# Altium PCB AD637-有效值检测新版.PcbDoc
Units mil, origin at the board's own origin, x right, y up, seen from the top; angles counter-clockwise.
Board outline 1968.5 x 1968.5 mil, 2 copper layers (Top Layer, Bottom Layer); 30 components, 19 nets, 97 pads, 12 vias.
Unrouted connection lines stored in the file: 2.
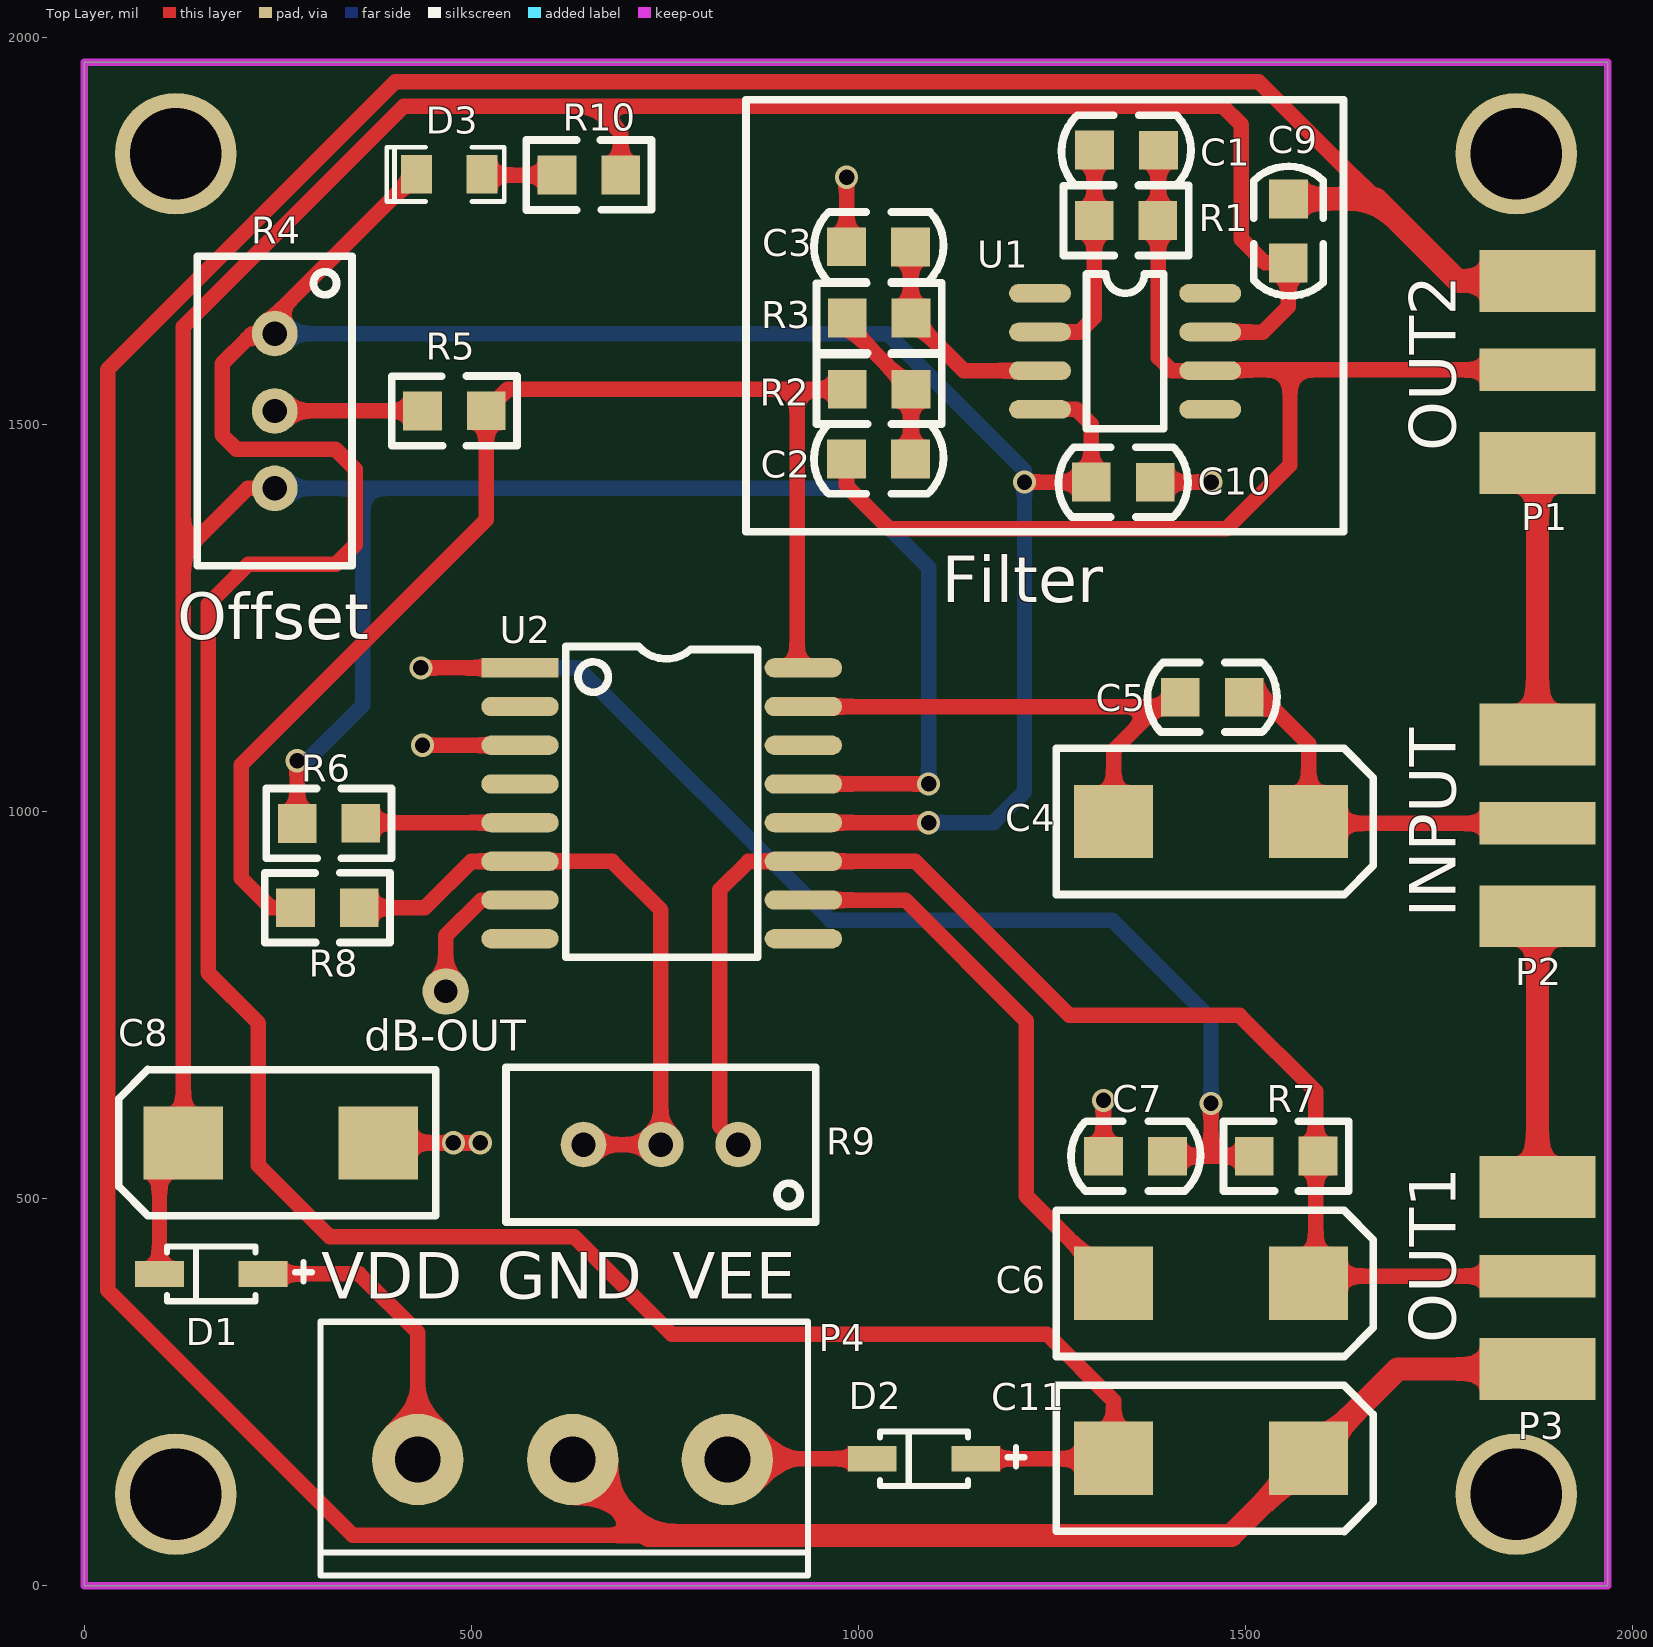
[diagram p0: Top Layer view]
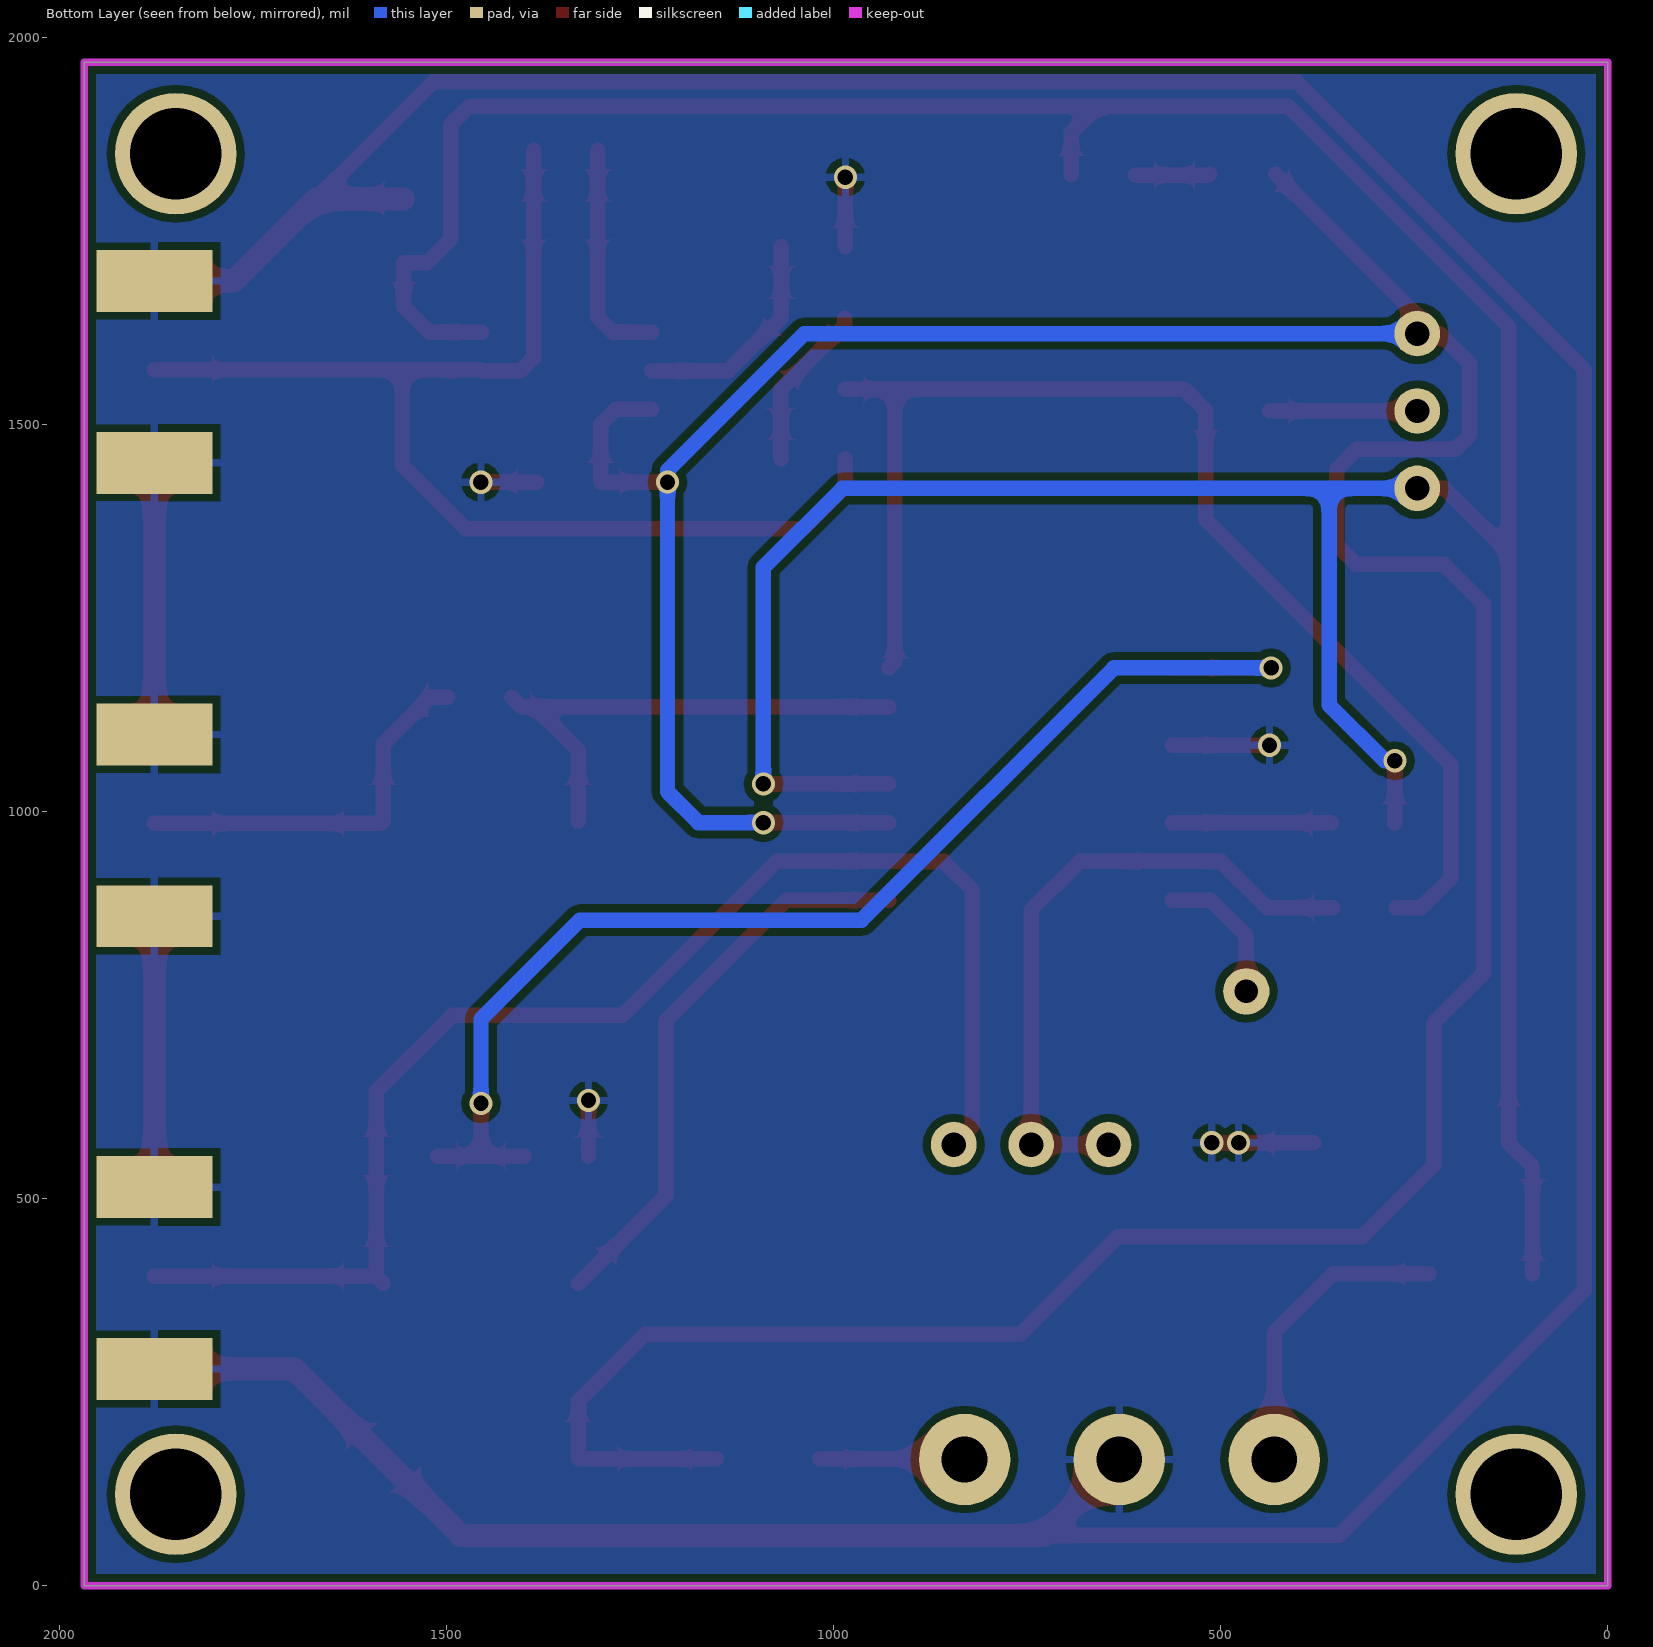
[diagram p1: Bottom Layer view, seen from below]
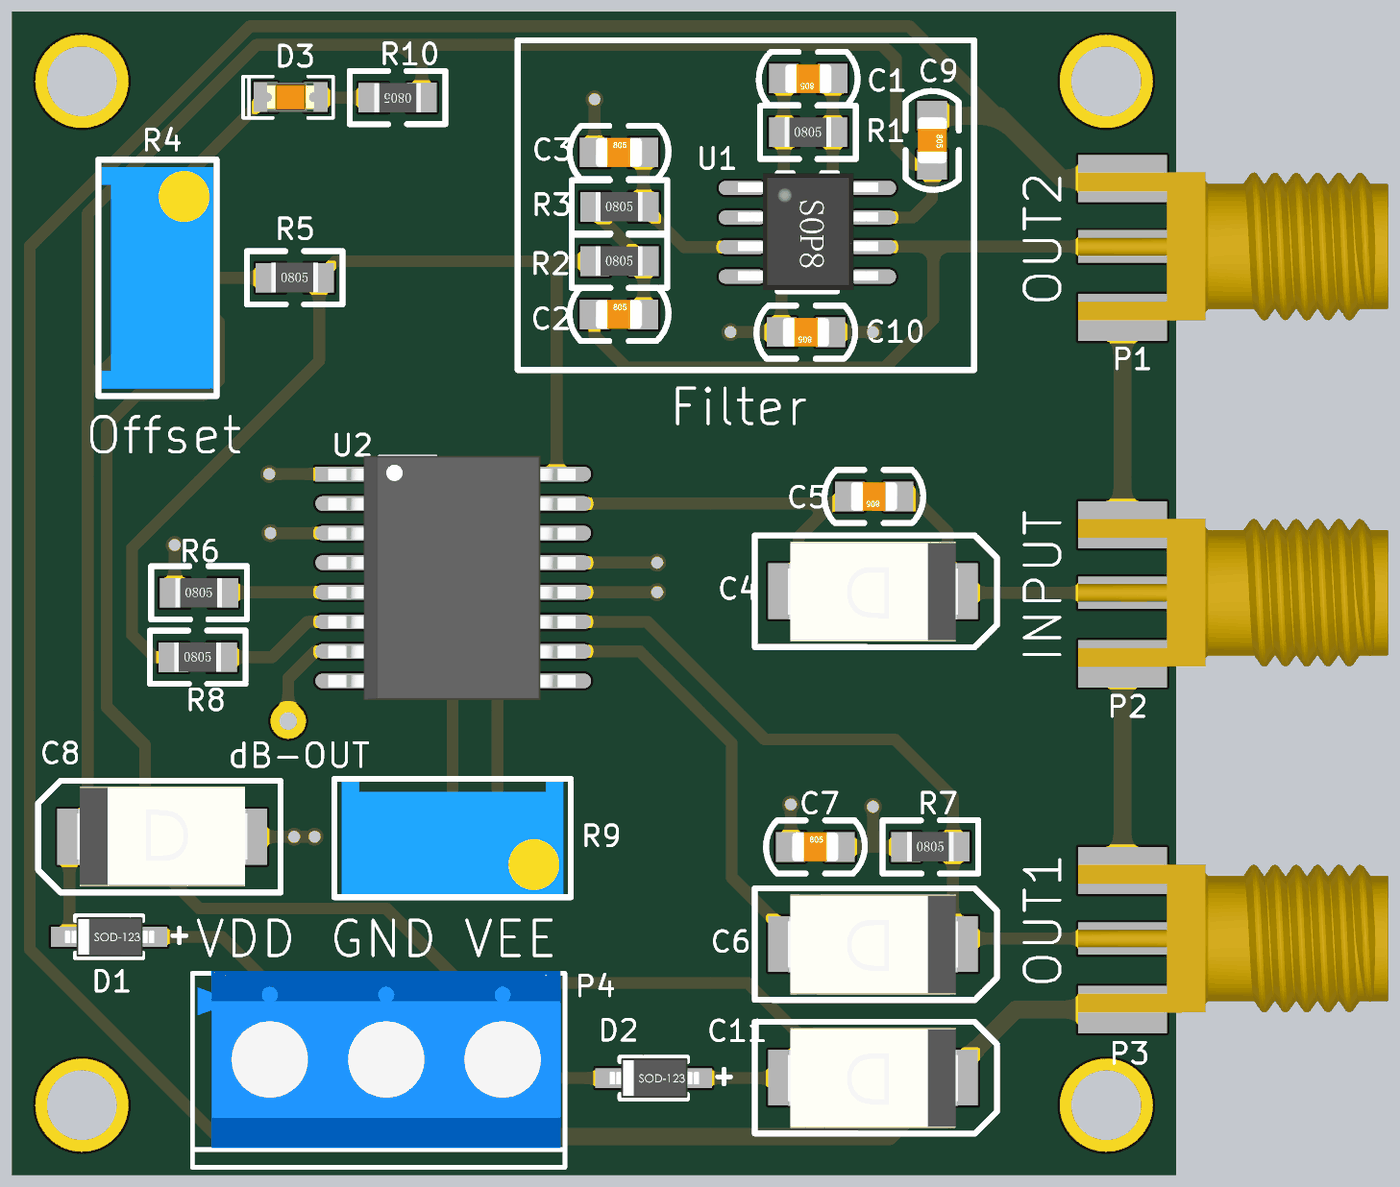
[diagram p2: 3D render of the assembled board from above, using the file's embedded part models]

## Layer stack, top to bottom
Top Solder: solder mask 0.4, Solder Resist, Dk 3.5
Top Layer: signal copper 1.4
Dielectric 1: dielectric 12.6, FR-4, Dk 4.8
Bottom Layer: signal copper 1.4
Bottom Solder: solder mask 0.4, Solder Resist, Dk 3.5

## Board outline
0,0 0,1968.5 1968.5,1968.5 1968.5,0

## Design rules (kind name [scope] priority, off if disabled: settings)
Clearance [All] p1: gap=10 ignorepadtopadclearanceinfootprint=FALSE except(0: Arc-Hole Track-Hole SMDPad-Hole THPad-Hole Via-Hole Fill-Hole Poly-Hole Region-Hole Text-Hole)
PolygonConnect [All] p1: connectstyle=Relief reliefconductorwidth=10 reliefentries=4 polygonreliefangle="90 Angle" airgapwidth=10
RoutingVias [All] p1: holewidth=28 width=50 viastyle="Through Hole" minholewidth=28 minwidth=50 maxholewidth=28 maxwidth=50
SolderMaskExpansion [All] p1: expansion=4
Width [All] p1: maxlimit=50 minlimit=10 preferedwidth=10
30 further rules are at their usual default settings.

## Components (designator, comment, footprint, x,y, rotation, side; value= is the part's Value field where it differs from the comment)
C1 "" C0805 1394,1855 r180 top
C2 "" C0805 979,1456 r0 top
C3 "" C0805 979,1730 r0 top
C4 "" C7343 1456,988 r180 top
C5 "" C0805 1505,1148 r180 top
C6 "" C7343 1456,391 r180 top
C7 "" C0805 1311,555 r0 top
C8 "" C7343 254,572 r0 top
C9 "" C0805 1556,1798 r270 top
C10 "" C0805 1390,1426 r180 top
C11 "" C7343 1456,165 r180 top
D1 "S14" SOD123 231,403 r0 top
D2 "S14" SOD123 1152,164 r0 top
D3 "LED" LED0805R 514,1824 r180 top
P1 "SMA" SM 1873,1571 r0 top
P2 "SMA" SM 1873,985 r0 top
P3 "SMA" SM 1873,400 r0 top
P4 "POWER" 3PIN-5.08B 831,163 r180 top
R1 "" R0805 1305,1764 r0 top
R2 "" R0805 986,1546 r0 top
R3 "" R0805 986,1638 r0 top
R4 "" 3296W 246,1518 r180 top
R5 "" R0805 437,1518 r0 top
R6 "" R0805 275,985 r0 top
R7 "" R0805 1512,555 r0 top
R8 "" R0805 273,876 r0 top
R9 "" 3296W 745,570 r90 top
R10 "" R0805 693,1823 r180 top
U1 "OPA177" SOP8 1236,1671 r0 top
U2 "AD637" AD637 563,1186 r0 top

## Footprints (in the part's own frame and the unit in brackets; to place one, negate y for a bottom-side part, rotate by r counter-clockwise, add the part's x,y. Pads: shape width x height; smd on the part's side, far side on the other; paste and mask are expansions set on the pad)
3PIN-5.08B [mm]
  round 3 hole 1.5: 1(0,0) 2(5.08,0) 3(10.16,0)
  silkscreen extent -2.64,-4.52 13.36,3.81, body extent -2.47,-4.62 13.13,2.98, height 10
3296W [mm]
  round 1.5 hole 0.8: 1(0,-2.54) 2(0,2.54) 3(0,0)
  silkscreen extent -2.54,-5.08 2.54,5.08, body extent -2.41,-4.76 2.42,4.76, height 11.55
AD637 [mm]
  rect 2.54x0.635 smd: 1(0,0)
  oval 2.54x0.635 smd: 2(0,-1.27) 3(0,-2.54) 4(0,-3.81) 5(0,-5.08) 6(0,-6.35) 7(0,-7.62) 8(0,-8.89) 9(9.3,-8.89) 10(9.3,-7.62) 11(9.3,-6.35) 12(9.3,-5.08) 13(9.3,-3.81) 14(9.3,-2.54) 15(9.3,-1.27) 16(9.3,0)
  silkscreen extent 1.5,-9.5 7.8,0.7, body extent -0.72,-9.71 9.91,0.79, height 2.56
C0805 [mil]
  rect 50x50 smd: 1(6,0) 2(88.7,-0.1)
  silkscreen extent -36,-45 131,45, body extent 8,-24 87,25, height 30
C7343 [mm] "D型"
  rect 2.6x2.4 smd: 1(-3.202,0.007) 2(3.198,0.007)
  silkscreen extent -5.33,-2.39 5.08,2.41, body extent -3.65,-2.12 3.65,2.18, height 2.9
LED0805R [mil]
  rect 40x50 smd: 1(0,0) 2(85,0)
  silkscreen extent -29,-35 123,35, body extent 3,-24 83,25, height 43
R0805 [mil] "1/8W"
  rect 50x50 smd: 1(0,0) 2(82.3,0.2)
  silkscreen extent -40,-45 122,45, body extent 1,-24 80,25, height 22
SM [mil]
  rect 150x55 smd: 1(4.84,0)
  rect 150x80 smd: 2(4.84,-120) 2(4.84,115)
  rect 150x80 smd far side: 2(4.84,-120) 2(4.84,115)
  body extent -70,-125 455,125, height 140
SOD123 [mm] "1206"
  rect 1.6x0.85 smd: 1(0,0) 2(-3.4,0)
  silkscreen extent -3.15,-0.9 1.6,0.9, body extent -3.6,-0.85 0.25,0.85, height 1.42
SOP8 [mil]
  oval 80x24 smd: 1(-1,-1) 2(-1,-51) 3(-1,-101) 4(-1,-151) 5(219,-151) 6(219,-101) 7(219,-51) 8(219,-1)
  silkscreen extent 59,-176 159,24, body extent -9,-174 229,24, height 63

## Part data
C1 C2 C3 C5 C7 C9 C10: library part Cap, "Capacitor"
C4 C6 C8 C11: library part "Cap Pol1", "Polarized Capacitor (Radial)"
D1 D2: library part "Diode 1N4007", "1 Amp General Purpose Rectifier"
P1 P2 P3: library part BNC, "BNC Elbow Connector"
P4: library part "Header 3", "Header, 3-Pin"
R1 R2 R3 R5 R6 R7 R8 R10: library part Res2, "Resistor"
R4 R9: library part RPot, "Potentiometer"

## Free pads (board coordinates)
  round 157.48 hole 118.11: 0(118.11,118.11) 0(118.11,1850.39) 0(1850.39,118.11) 0(1850.39,1850.39)
  round 60 hole 30: 2(467,768)

## Via types
v1: diameter 30, hole 20, Top Layer to Bottom Layer, tented both sides, 12 vias

## Nets (pads, with @x,y where several pads share a name; then routed paths per layer and width w, separated by ;. In a path a pad name is that pad's centre, name@x,y a point inside that pad or via, vN(x,y) a via of type N, cw(c..) or ccw(c..) an arc to the next point about the centre after c; other vN are vias at no path point)
GND: C3.1 C7.1 C8.2 C9.1 C10.1 C11.1 P1.2 P2.2 P3.2 P4.2 U2.3 | length 6810.7
  Top Layer w20: C8.2 v1(511.72,572.28) ; v1(437,1086) U2.3 ; 729,65 347,65 30,382 30,1571.43 402.08,1943.5 1517.5,1943.5 1669,1792 ; C3.1 v1(985,1820) ; C7.1 v1(1317,627) ; C10.1 v1(1456,1426)
  Top Layer w30: P4.2 729,65 1482.34,65 C11.1 1697.34,280 P3.2@1877.84,280 ; C9.1 1669,1792 1775,1686 P1.2@1877.84,1686 ; P3.2@1877.84,515 P2.2@1877.84,865 ; P2.2@1877.84,1100 P1.2@1877.84,1451
  other v1: 477,572.28
NetC1_1: C1.1 C2.1 P1.1 R1.2 U1.6 | length 1553
  Top Layer w20: C2.1 985,1421 1040,1366 1476,1366 1558,1448 1558,1571 ; C1.1 1388,1587 1405,1570 U1.6 1456,1571 1558,1571 ; P1.1 1558,1571
NetC1_2: C1.2 R1.1 U1.2 | length 294.1
  Top Layer w20: U1.2 1286,1620 1305.3,1639.3 C1.2
NetC2_2: C2.2 R2.2 R3.1 | length 216.4
  Top Layer w20: R3.1 986,1628.5 R2.2 1068.3,1456.5 C2.2
NetC3_2: C3.2 R3.2 U1.3 | length 286.9
  Top Layer w20: C3.2 1067.7,1638.8 R3.2 1136.5,1570 U1.3
NetC4_1: C4.1 C5.1 P2.1 | length 505.1
  Top Layer w20: C5.1 1522,1148 1582.06,1087.94 C4.1 1584.79,985 P2.1
NetC4_2: C4.2 C5.2 U2.15 | length 681.2
  Top Layer w20: U2.15 C5.2@1404.2,1136 ; C4.2 1330.09,1079.09 1387,1136 C5.2@1404.2,1136 ; C5.2 C5.2@1404.2,1136
NetC6_1: C6.1 P3.1 R7.2 R9.1 U2.11 | length 1786.1
  Top Layer w20: R9.1 821,594 821,899 858,936 U2.11 1074,936 1273,737 1493,737 1591.34,638.66 C6.1@1591.34,400 ; C6.1 C6.1@1591.34,400 ; P3.1 C6.1@1591.34,400
NetC6_2: C6.2 U2.10 | length 738.6
  Top Layer w20: U2.10 1061,886 1217,730 1217,503.82 C6.2
NetC7_2: C7.2 R7.1 U2.1 | length 1626.4
  Top Layer w20: v1(435,1186) U2.1 ; C7.2 1399.8,555 1455.9,555 ; v1(1455.9,623.1) 1455.9,555 ; R7.1 1455.9,555
  Bottom Layer w20: v1(435,1186) 638,1186 964,860 1328,860 1455.9,732.1 v1(1455.9,623.1)
NetD1_1: D1.1 P4.3 | length 395.5
  Top Layer w20: D1.1 355,403 431,327 P4.3
NetD2_2: D2.2 P4.1 | length 187.6
  Top Layer w20: P4.1 832,164 D2.2
NetD3_1: D3.1 R10.2 | length 97.2
  Top Layer w20: D3.1 515.2,1822.8 R10.2
NetR2_1: R2.1 R5.2 R8.1 U2.16 | length 1662.5
  Top Layer w20: R8.1 241,876 203,914 203,1061 519.3,1377.3 R5.2 547.1,1546 921,1546 ; U2.16 921,1194.14 921,1546 ; R2.1 921,1546
NetR4_3: R4.3 R5.1 | length 191
  Top Layer w20: R4.3 R5.1
NetR6_2: R6.2 U2.5 | length 206
  Top Layer w20: R6.2 358.1,986 U2.5
NetR8_2: R8.2 R9.2 R9.3 U2.6 | length 843.6
  Top Layer w20: R8.2 440.2,876.2 500,936 U2.6 682,936 745,873 R9.3 R9.2
VDD: C8.1 C9.2 D1.2 R4.2 R6.1 R10.1 U1.7 U2.13 | length 5182.8
  Top Layer w20: D1.2 97.14,541.48 C8.1 127.94,1334.94 ; R4.2 211,1418 127.94,1334.94 ; R6.1 v1(275,1066) ; R10.1 693,1878 659,1912 ; U2.13 v1@1089,1036 ; U1.7 1523,1620 1555.9,1652.9 C9.2 1525.7,1709.3 1495,1740 1495,1888 1471,1912 659,1912 ; 127.94,1334.94 127.94,1626.94 413,1912 659,1912
  Bottom Layer w20: R4.2 360,1418 ; v1(275,1066) 288,1066 360,1138 360,1418 ; v1(1091,1036) 1091,1316 989,1418 360,1418
VEE: C10.2 C11.2 D2.1 D3.2 R4.1 U1.4 U2.12 | length 5224
  Top Layer w20: R4.1 R4.1@223,1618 ; D3.2 R4.1@223,1618 ; U2.12 v1(1091,986) ; D2.1 1329.37,164 C11.2 1330.09,238.91 1244,325 759,325 633,451 317,451 225,543 225,727 160,792 160,1268 212,1320 325,1320 350,1345 350,1443 324.53,1468.47 196.53,1468.47 178,1487 178,1579 210,1611 ; v1(1214.9,1426.1) C10.2 1301.3,1500.7 1282,1520 U1.4 ; 210,1611 217,1618 R4.1@223,1618 ; 210,1611 216,1611 R4.1@223,1618
  Bottom Layer w20: R4.1 1038,1618 1214.9,1441.1 v1(1214.9,1426.1) 1214.9,1025.9 1175,986 v1(1091,986)
pads on no net: U1.1 U1.5 U1.8 U2.2 U2.4 U2.7 U2.8 U2.9 U2.14
copper on no net: | length 187.1
  Top Layer w20: 467,768 467,840 513,886 563,886

## Polygon pours and split planes (outlines as drawn)
GND on Bottom Layer "Top Layer-No Net" (solid, remove dead copper, pour order 0): -21,497 -21,1979 299,1979 1974,1979 1974,371 1974,-12 511,-12 -25,-12 -25,583

## Keep-outs
Keep-Out Layer:
  the board outline again, w10

## Silkscreen, mask and mechanical layers (free items; w line width, h text height)
Top Overlay:
  lines w10: 855,1362 855,1523 855,1920 1627,1920 1627,1362 855,1362
  text "OUT2" at 1772,1466 h60 r90
  text "Filter" at 1108,1271 h60
  text "Offset" at 120,1223 h60
  text "INPUT" at 1772,863 h60 r90
  text "dB-OUT" at 362,691 h40
  text "VDD" at 306,371 h60
  text "GND" at 533,371 h60
  text "VEE" at 760,371 h60
  text "OUT1" at 1772,313 h60 r90

## Dimensions
1850.39,1850.39 to 118.11,1850.39 on Mechanical 1
0,1968.5 to 1968.5,1968.5 on Mechanical 1
118.11,118.11 to 118.11,1850.39 on Mechanical 1
0,1968.5 to 0,0 on Mechanical 1